# EAGLE board qsd67lc (EAGLE 9.2.1)
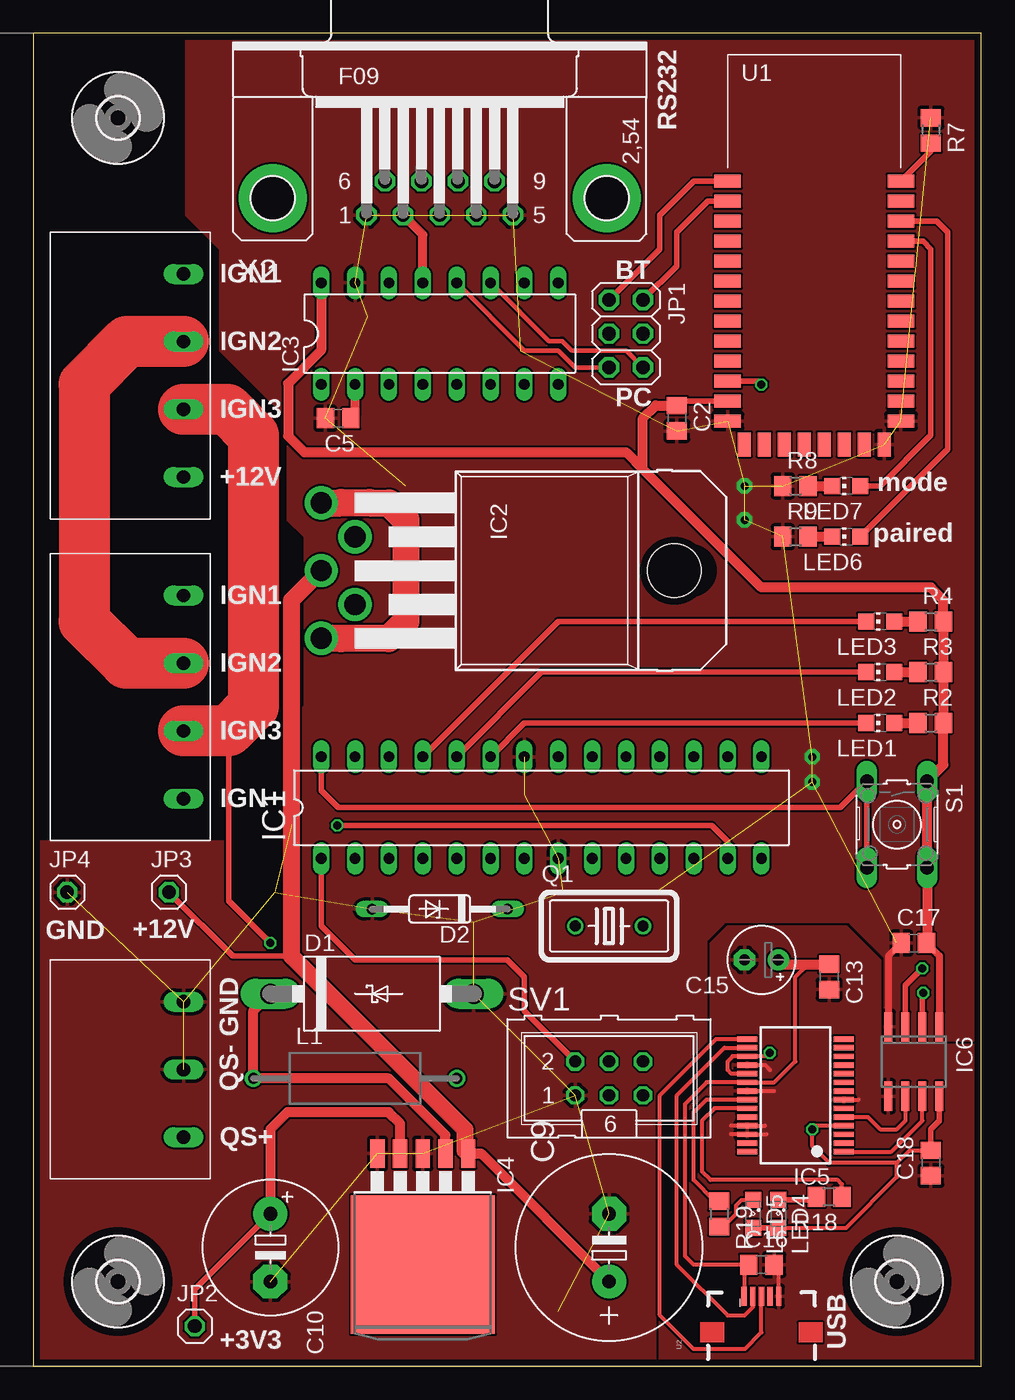
[diagram p0: board, top side]
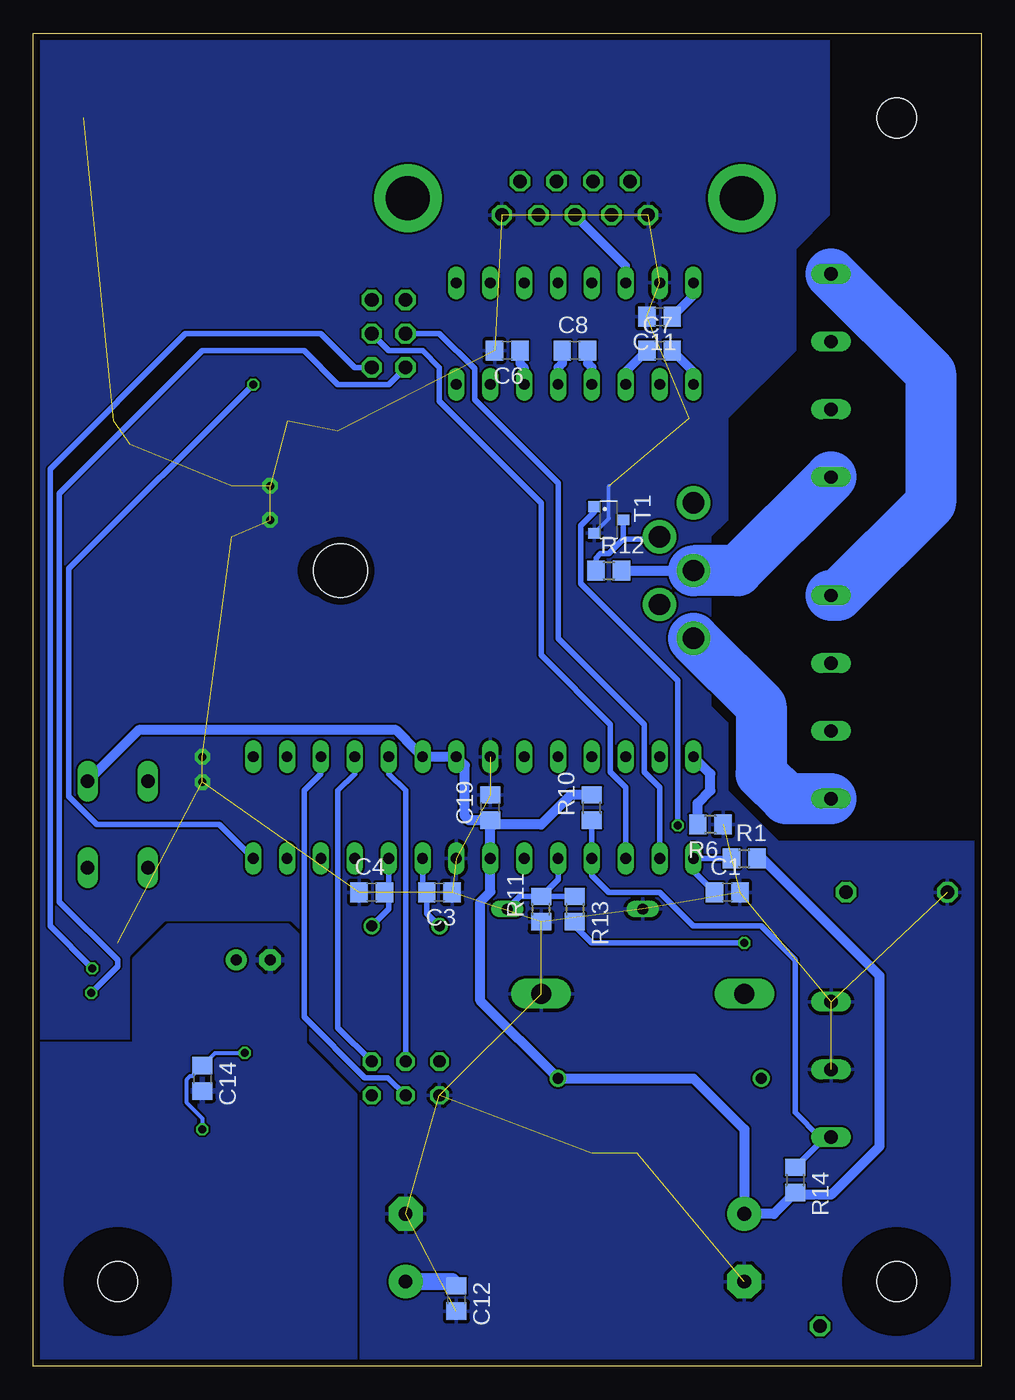
[diagram p1: board, bottom side, seen from below]

Size 71.1 x 100 mm. Coordinates in mm from the lower left corner, seen from the top.
Outline: 0,0 71.1,0 71.1,100 0,100 0,0
Copper layers (1*16): Top 0.035mm / dielectric 1.6mm / Bottom 0.035mm
Design rules "Elecrow_2-layer_PCB_eagle_rule": minimum track width 6mil, minimum drill 12mil, track to track 6mil, track to pad 6mil, pad to pad 6mil, via to via 8mil, smd to smd 0mil, copper to edge 20mil, drill to drill 10mil, minimum pad ring 6mil, minimum via ring 6mil, stop-mask expansion 0mil, vias tented up to drill 100mil, thermal gap 10mil

## Footprints (pad centres in the part's own frame; a part is rotated, then mirrored left to right if it is on the bottom)
C0805 = smd 1.3 x 1.5: 1 -0.95,0; 2 0.95,0
E5-13 = drill 1.016 pad 2.54: + -2.54,0 | drill 1.016 pad 2.54 octagon: - 2.54,0
E5-10,5 = drill 1.016 pad 2.54: + -2.54,0 | drill 1.016 pad 2.54 octagon: - 2.54,0
E2,5-5 = drill 0.813 pad 1.6: + -1.27,0 | drill 0.813 pad 1.6 octagon: - 1.27,0
CON-RIA-P4 = drill 1 long: P$1 3.14,10; P$2 8.22,10; P$3 13.3,10; P$4 18.38,10
CON-RIA-P3 = drill 1 long: P$1 3.14,10; P$2 8.22,10; P$3 13.3,10
DO201T15 = drill 1.499 long: A 7.62,0; C -7.62,0
DO35Z10 = drill 0.813 long: A 5.08,0; C -5.08,0
3,0 = hole 3: 0,0
DIL28-3 = drill 0.813 long: 1 -16.51,-3.81; 2 -13.97,-3.81; 3 -11.43,-3.81; 4 -8.89,-3.81; 5 -6.35,-3.81; 6 -3.81,-3.81; 7 -1.27,-3.81; 8 1.27,-3.81; 9 3.81,-3.81; 10 6.35,-3.81; 11 8.89,-3.81; 12 11.43,-3.81; 13 13.97,-3.81; 14 16.51,-3.81; 15 16.51,3.81; 16 13.97,3.81; 17 11.43,3.81; 18 8.89,3.81; 19 6.35,3.81; 20 3.81,3.81; 21 1.27,3.81; 22 -1.27,3.81; 23 -3.81,3.81; 24 -6.35,3.81; 25 -8.89,3.81; 26 -11.43,3.81; 27 -13.97,3.81; 28 -16.51,3.81
TO220-52 = drill 1.6 pad 2.5: 1 -5.08,-30.48; 2 -2.54,-27.94; 3 0,-30.48; 4 2.54,-27.94; 5 5.08,-30.48 | hole 4.05: 0,-4
DIL16 = drill 0.813 long: 1 -8.89,-3.81; 2 -6.35,-3.81; 3 -3.81,-3.81; 4 -1.27,-3.81; 5 1.27,-3.81; 6 3.81,-3.81; 7 6.35,-3.81; 8 8.89,-3.81; 9 8.89,3.81; 10 6.35,3.81; 11 3.81,3.81; 12 1.27,3.81; 13 -1.27,3.81; 14 -3.81,3.81; 15 -6.35,3.81; 16 -8.89,3.81
TO263-5 = smd 1.067 x 2.159: 1 -3.404,-5.791; 2 -1.702,-5.791; 3 0,-5.791; 4 1.702,-5.791; 5 3.404,-5.791 | smd 10.8 x 10.41: 6 0,2.54
SSOP28 = smd 0.4 x 1.5: 1 -4.225,-3.625; 2 -3.575,-3.625; 3 -2.925,-3.625; 4 -2.275,-3.625; 5 -1.625,-3.625; 6 -0.975,-3.625; 7 -0.325,-3.625; 8 0.325,-3.625; 9 0.975,-3.625; 10 1.625,-3.625; 11 2.275,-3.625; 12 2.925,-3.625; 13 3.575,-3.625; 14 4.225,-3.625; 15 4.225,3.625; 16 3.575,3.625; 17 2.925,3.625; 18 2.275,3.625; 19 1.625,3.625; 20 0.975,3.625; 21 0.325,3.625; 22 -0.325,3.625; 23 -0.975,3.625; 24 -1.625,3.625; 25 -2.275,3.625; 26 -2.925,3.625; 27 -3.575,3.625; 28 -4.225,3.625
SO-08 = smd 0.6 x 2.2: 1 -1.905,-2.6; 2 -0.635,-2.6; 3 0.635,-2.6; 4 1.905,-2.6; 5 1.905,2.6; 6 0.635,2.6; 7 -0.635,2.6; 8 -1.905,2.6
2X03 = drill 1.016 octagon: 1 -2.54,-1.27; 2 -2.54,1.27; 3 0,-1.27; 4 0,1.27; 5 2.54,-1.27; 6 2.54,1.27
1X01 = drill 1.016 octagon: 1 0,0
2200-15.24 = drill 0.8 pad 1.27: 1 -7.62,0; 2 7.62,0
CHIP-LED0805 = smd 1.2 x 1.2: A 0,-1.05; C 0,1.05
SML0805 = smd 1.2 x 1.2: A 1.05,0; C -1.05,0
HC18U-V = drill 0.813: 1 -2.54,0; 2 2.54,0
R0805 = smd 1.3 x 1.5: 1 -0.95,0; 2 0.95,0
B3F-10XX = drill 1.016 long: 1 -3.251,2.261; 2 3.251,2.261; 3 -3.251,-2.261; 4 3.251,-2.261
ML6 = drill 0.914 octagon: 1 -2.54,-1.27; 2 -2.54,1.27; 3 0,-1.27; 4 0,1.27; 5 2.54,-1.27; 6 2.54,1.27
SOT23-R_INFINEON = smd 0.8 x 0.9: 1 -1,-1.1; 2 1,-1.1; 3 0,1.1
BLUETOOTH_SMD = smd 2 x 1: 1 -6.35,3.81; 2 -6.35,2.31; 3 -6.35,0.81; 4 -6.35,-0.69; 5 -6.35,-2.19; 6 -6.35,-3.69; 7 -6.35,-5.19; 8 -6.35,-6.69; 9 -6.35,-8.19; 10 -6.35,-9.69; 11 -6.35,-11.19; 12 -6.35,-12.69; 13 -6.35,-14.19; 22 6.65,-14.19; 23 6.65,-12.69; 24 6.65,-11.19; 25 6.65,-9.69; 26 6.65,-8.19; 27 6.65,-6.69; 28 6.65,-5.19; 29 6.65,-3.69; 30 6.65,-2.19; 31 6.65,-0.69; 32 6.65,0.81; 33 6.65,2.31; 34 6.65,3.81 | smd 1 x 1.8: 14 -5.1,-15.94; 15 -3.6,-15.94; 16 -2.1,-15.94; 17 -0.6,-15.94; 18 0.9,-15.94; 19 2.4,-15.94; 20 3.9,-15.94; 21 5.4,-15.94
USB-MICRO-SMD = smd 1.4 x 0.4: D+1 2.7,0; D-1 2.7,0.65; GND1 2.7,-1.3; ID1 2.7,-0.65; VBUS1 2.7,1.3
F09HP = drill 1.016 octagon: 1 -5.486,-1.27; 2 -2.743,-1.27; 3 0,-1.27; 4 2.743,-1.27; 5 5.486,-1.27; 6 -4.115,1.27; 7 -1.372,1.27; 8 1.372,1.27; 9 4.115,1.27 | drill 3.302 pad 5.08: G1 -12.522,0; G2 12.522,0

## Placement (x,y rotation side)
C1  100nF  [C0805]  19.05,35.56 0 bottom
C2  100nF  [C0805]  48.26,71.12 270 top
C3  15pF  [C0805]  40.64,35.56 180 bottom
C4  15pF  [C0805]  45.72,35.56 0 bottom
C5  100nF  [C0805]  22.86,71.12 180 top
C6  100nF  [C0805]  35.56,76.2 180 bottom
C7  100nF  [C0805]  24.13,76.2 0 bottom
C8  100nF  [C0805]  30.48,76.2 0 bottom
C9  100uF  [E5-13]  43.18,8.89 90 top
C10  1000uF  [E5-10,5]  17.78,8.89 270 top
C11  100nF  [C0805]  24.13,78.74 180 bottom
C12  100nF  [C0805]  39.37,5.08 270 bottom
C13  100nF  [C0805]  59.69,29.21 270 top
C14  100nF  [C0805]  58.42,21.59 270 bottom
C15  4,7µF  [E2,5-5]  54.61,30.48 180 top
C16  100nF  [C0805]  54.61,7.62 0 top
C17  100nF  [C0805]  66.04,31.75 0 top
C18  100nF  [C0805]  67.31,15.24 90 top
C19  100nF  [C0805]  36.83,41.91 90 bottom
CON1  RIA-AKL-230-04  [CON-RIA-P4]  1.27,85.09 270 top
CON2  RIA-AKL-230-04  [CON-RIA-P4]  1.27,60.96 270 top
CON3  RIA-AKL-230-03  [CON-RIA-P3]  1.27,30.48 270 top
D1  1N5822  [DO201T15]  25.4,27.94 0 top
D2  BZX55C3V3  [DO35Z10]  30.48,34.29 180 top
H1  MOUNT-HOLE3.0  [3,0]  6.35,6.35 0 top
H3  MOUNT-HOLE3.0  [3,0]  64.77,6.35 0 top
H4  MOUNT-HOLE3.0  [3,0]  6.35,93.65 0 top
IC1  MEGA8-P  [DIL28-3]  38.1,41.91 0 top
IC2  BTS555E3146  [TO220-52]  52.07,59.69 270 top
IC3  MAX3232CPE  [DIL16]  30.48,77.47 0 top
IC4  LM2576S  [TO263-5]  29.21,10.16 180 top
IC5  FT232RL  [SSOP28]  57.15,20.32 90 top
IC6  ISO7221A  [SO-08]  66.04,22.86 180 top
JP1  UART_SELECTOR  [2X03]  44.45,77.47 270 top
JP2  [1X01]  12.11,3 0 top
JP3  [1X01]  10.16,35.56 0 top
JP4  [1X01]  2.54,35.56 0 top
L1  100uH  [2200-15.24]  24.13,21.59 0 top
LED1  blue  [CHIP-LED0805]  63.5,48.26 90 top
LED2  green  [CHIP-LED0805]  63.5,52.07 90 top
LED3  red  [CHIP-LED0805]  63.5,55.88 90 top
LED4  green  [SML0805]  55.88,11.43 270 top
LED5  orange  [SML0805]  53.98,11.43 270 top
LED6  red  [CHIP-LED0805]  60.96,62.23 90 top
LED7  blue  [CHIP-LED0805]  60.96,66.04 90 top
Q1  16MHz  [HC18U-V]  43.18,33.02 0 top
R1  10k  [R0805]  17.78,38.1 0 bottom
R2  220R  [R0805]  67.31,48.26 0 top
R3  220R  [R0805]  67.31,52.07 0 top
R4  220R  [R0805]  67.31,55.88 0 top
R6  10k  [R0805]  20.32,40.64 180 bottom
R7  10k  [R0805]  67.31,92.71 270 top
R8  220R  [R0805]  57.15,66.04 0 top
R9  220R  [R0805]  57.15,62.23 0 top
R10  10k  [R0805]  29.21,41.91 90 bottom
R11  33k  [R0805]  33.02,34.29 90 bottom
R12  2k2  [R0805]  27.94,59.69 0 bottom
R13  67k  [R0805]  30.48,34.29 270 bottom
R14  10k  [R0805]  13.97,13.97 270 bottom
R18  270R  [R0805]  59.69,12.7 180 top
R19  270R  [R0805]  51.44,11.43 270 top
S1  [B3F-10XX]  64.77,40.64 270 top
SV1  ISP  [ML6]  43.18,21.59 0 top
T1  BCR141  [SOT23-R_INFINEON]  27.94,63.5 270 bottom
U1  HC_05  [BLUETOOTH_SMD]  58.42,85.09 0 top
U2  [USB-MICRO-SMD]  54.61,2.54 90 top
X2  RS232  [F09HP]  30.48,87.63 0 top

## Library data of the parts
C1-C19 = rcl; SPICEPREFIX: C
CON1-CON3 = con-ria
D1 D2 = diode
H1 H3 H4 = holes
IC1 = atmel; OC_FARNELL: unknown; OC_NEWARK: unknown
IC2 = infineon; OC_FARNELL: unknown; OC_NEWARK: unknown
IC3 = maxim; MF: MAXIM; MPN: MAX3232CPE+; OC_FARNELL: 9724494; OC_NEWARK: 68K4626
IC4 = v-reg-3
IC5 = ftdichip; MPN: FT232RL; OC_FARNELL: 1146032; OC_NEWARK: 91K9918
IC6 = texas; MPN: ISO7221AD; OC_FARNELL: 1390651; OC_NEWARK: 48M0672
JP1-JP4 = pinhead
L1 = rcl; SPICEPREFIX: L
LED1-LED7 = led
Q1 = crystal; OC_FARNELL: unknown; OC_NEWARK: unknown
R1-R4 R6-R14 R18 R19 = rcl; SPICEPREFIX: R
S1 = switch-omron; MPN: B3F-1000; OC_FARNELL: 176432; OC_NEWARK: 36M3542
SV1 = con-harting-ml; OC_FARNELL: unknown; OC_NEWARK: unknown
T1 = digital-transistors-2
U1 = Bluetooth HC-05
U2 = MicroUSB
X2 = con-subd; OC_FARNELL: unknown; OC_NEWARK: unknown

## Nets
12V_OUT: CON2.P$4 IC2.1 IC2.5
+3V3: C2.1 C10.+ C11.1 C17.2 C19.1 IC1.7 IC1.20 IC1.21 IC3.16 IC4.4 IC6.1 JP2.1 L1.2 R1.2 R2.2 R3.2 R4.2 R10.2 R14.2 S1.1 S1.2 U1.12
+12V: C9.+ C12.1 CON1.P$4 IC2.3 IC4.1 JP3.1 R12.2
CS: IC1.16
GND: C1.2 C2.2 C3.1 C4.1 C5.2 C6.2 C9.- C10.- C11.2 C12.2 C17.1 C19.2 CON3.P$1 CON3.P$2 D1.A D2.A IC1.8 IC1.22 IC3.15 IC4.3 IC4.5 IC6.4 JP4.1 R6.1 R7.1 R8.1 R9.1 R11.1 SV1.1 T1.2 U1.13 U1.21 U1.22 X2.1 X2.5
GND_USB: C13.2 C14.2 C15.- C16.2 C18.1 IC5.7 IC5.18 IC5.21 IC5.25 IC5.26 IC6.5 U2.GND1
HC05_RST: IC1.14 U1.11
IGN0: CON1.P$3 CON2.P$3 R13.2
IGN1: CON1.P$2 CON2.P$2
IGN2: CON1.P$1 CON2.P$1
IGN_CTL: IC1.13 T1.1
MISO: IC1.18 SV1.6
MODE_KEY: R7.2 U1.34
MOSI: IC1.17 SV1.3
N$1: IC1.24 LED2.C
N$2: C3.2 IC1.9 Q1.1
N$3: C4.2 IC1.10 Q1.2
N$4: LED2.A R3.1
N$5: LED1.A R2.1
N$6: LED3.A R4.1
N$7: IC1.23 LED1.C
N$9: IC1.25 LED3.C
N$11: C5.1 IC3.2
N$12: IC1.28 R6.2 S1.3 S1.4
N$13: LED7.C R8.2
N$14: LED6.C R9.2
N$15: C6.1 IC3.6
N$16: IC2.2 R12.1 T1.3
N$17: C7.2 IC3.1
N$18: C8.2 IC3.4
N$19: C8.1 IC3.5
N$20: C7.1 IC3.3
N$22: D1.C IC4.2 L1.1
N$23: LED4.C R18.2
N$26: LED5.C R19.2
PAIRED_STATE: LED6.A U1.32
QS+: CON3.P$3 IC1.4 R10.1 R14.1
RESET: C1.1 IC1.1 R1.1 SV1.2
RPM_INT: D2.C IC1.5 R11.2 R13.1
RS232_RX: IC3.14 X2.3
RS232_RX_D: IC5.1 IC6.7
RS232_TX: IC3.13 X2.2
RS232_TX_D: IC5.5 IC6.6
RXD: IC1.2 JP1.3
RXD_BT: JP1.1 U1.1
RXD_RS232: IC3.12 IC6.2 JP1.5
SCK: IC1.19 SV1.4
TXD: IC1.3 JP1.4
TXD_BT: JP1.2 U1.2
TXD_RS232: IC3.11 IC6.3 JP1.6
USB_D+: IC5.15 U2.D+1
USB_D-: IC5.16 U2.D-1
USB_RX_LED: IC5.23 R18.1
USB_TX_LED: IC5.22 R19.1
VCC_USB: C13.1 C15.+ C16.1 IC5.20 U2.VBUS1
VCCIO_USB: C14.1 C18.2 IC5.4 IC5.17 IC5.19 IC6.8 LED4.A LED5.A
WORK_MODE: LED7.A U1.31

## Tracks (layer width: path | path; a pad name or v marks a point on that pad's centre or on a via)
12V_OUT
  Top 2.032: IC2.1 23.03,64.77 23.07,64.8 25.2,64.8 25.23,64.77 26.67,64.77 27.94,63.5 27.94,59.69 27.94,55.88 26.64,54.58 23.07,54.58 23.03,54.61 IC2.5
  Bottom 3.81: IC2.5 16.51,49.53 16.51,44.45 14.64,42.58 CON2.P$4
+3V3
  Top 0.406: C2.1 48.59,72.4 U1.12 | JP2.1 12.11,5.76 C10.+
  Top 0.508: C17.2 67.94,30.8 IC6.1
  Top 0.762: IC4.4 27.51,18.21 26.67,19.05 19.05,19.05 17.78,17.78 C10.+ | 45.72,67.31 54.61,58.42 67.31,58.42 68.26,57.47 R4.2 R3.2 R2.2 68.26,45.12 S1.1 S1.2 67.03,31.79 C17.2 | C2.1 46.67,72.07 45.72,71.12 45.72,67.31 | IC3.16 21.59,76.22 19.1,73.73 19.1,69.8 20.32,68.58 44.45,68.58 45.72,67.31
  Bottom 0.406: R14.2 14.13,12.86
  Bottom 0.66: C11.1 21.59,80.33 IC3.16 | 36.51,40.64 C19.1
  Bottom 0.762: R10.2 30.8,42.86 33.02,40.64 36.51,40.64 | S1.1 63.2,47.73 43.89,47.73 43.1,46.94 43.1,46.91 IC1.20 IC1.21 38.73,45.09 38.73,41.27 38.42,40.96 C19.1 IC1.7 36.83,35.58 37.57,34.85 37.57,27.41 L1.2 21.59,21.59 17.78,17.78 C10.+ 15.56,11.43 14.13,12.86 11.27,12.86 7.62,16.51 7.62,29.29 16.43,38.1 R1.2
+12V
  Top 0.406: 19.36,30.77 14.95,30.77 JP3.1
  Top 0.762: IC4.1 33.58,15.95 C9.+
  Top 1.27: IC4.1 32.38,16.18 32.38,17.74 19.36,30.77 19.36,57.45 IC2.3
  Bottom 0.762: R12.2 IC2.3
  Bottom 1.27: C12.1 39.69,6.35 C9.+
  Bottom 3.81: CON1.P$4 18.29,59.69 IC2.3
GND  (via drill 0.6 pad 1.15)  (37 unrouted)
  Top 0.305: 64.14,26.04 IC6.4 | 64.77,31.75 C17.1
  Top 0.508: C17.1 64.14,30.8 IC6.4
  Bottom 0.305: T1.2 27.94,63.6 27.94,66.04
  other vias: 58.42,45.72 58.42,43.81 53.34,63.5 53.34,66.04
  pour Bottom (rank 3): 11.43,100.33 11.43,86.36 13.97,83.82 13.97,76.2 19.05,71.12 19.05,63.5 20.32,62.23 20.32,49.53 19.05,48.26 19.05,43.18 15.24,39.37 0,39.37 0,0 71.12,0 71.12,100.33
  pour Top (rank 3): 11.43,100.33 11.43,86.36 13.97,83.82 13.97,76.2 19.05,71.12 19.05,63.5 20.32,62.23 20.32,49.53 19.05,48.26 19.05,43.18 15.24,39.37 0,39.37 0,0 71.12,0 71.12,100.33
GND_USB
  Top 0.305: U2.GND1 55.91,7.27 C16.2 | 54.88,18.05 IC5.25 52.34,18.05 | 54.99,17.39 IC5.26 52.32,17.39 | IC5.21 55.55,20.64 | IC5.7 61.91,20 | IC5.18 54.88,22.59 55.24,22.23
  pour Top: 71.12,0 46.99,0 46.99,20.32 50.8,24.13 50.8,31.75 52.07,33.02 60.96,33.02 63.5,30.48 63.5,24.13 71.12,24.13
  pour Bottom: 71.12,24.13 71.12,0 46.99,0 46.99,20.32 50.8,24.13 50.8,31.75 52.07,33.02 60.96,33.02 63.5,30.48 63.5,24.13
HC05_RST  (via drill 0.6)
  Top 0.406: U1.11 54.37,73.9 v54.61,73.66
  Bottom 0.406: IC1.14 57.15,40.64 66.34,40.64 68.43,42.73 68.43,59.84 v54.61,73.66
IGN0  (via drill 0.6)
  Top 0.406: v17.78,31.75 14.64,34.89 14.64,47.66
  Top 3.81: CON1.P$3 14.57,71.79 16.51,69.85 16.51,49.53 14.64,47.66 CON2.P$3
  Bottom 0.406: R13.2 30.48,33.02 29.21,31.75 v17.78,31.75
IGN1
  Top 3.81: CON1.P$2 7.02,76.87 3.81,73.66 3.81,55.88 6.95,52.74 CON2.P$2
IGN2
  Bottom 3.81: CON1.P$1 3.81,74.49 3.81,64.77 10.76,57.82 CON2.P$1
IGN_CTL  (via drill 0.6)
  Top 0.406: IC1.13 52.07,39.37 50.88,40.56 v22.78,40.56
  Bottom 0.406: v22.78,40.56 22.78,51.46 30.05,58.73 30.05,63.06 29.04,64.07 T1.1
MISO
  Bottom 0.406: SV1.6 48.26,25.4 48.26,43.18 46.99,44.45 IC1.18
MODE_KEY
  Top 0.406: U1.34 67.31,91.14 R7.2
MOSI
  Bottom 0.406: SV1.3 44.5,21.64 46.23,21.64 50.8,26.22 50.8,43.18 49.53,44.45 IC1.17
N$1
  Top 0.406: LED2.C 38.1,52.07 IC1.24
N$2
  Bottom 0.406: Q1.1 41.59,33.97 C3.2 41.91,35.88 IC1.9
N$3
  Bottom 0.406: Q1.2 44.45,34.29 44.45,35.24 C4.2 44.45,35.88 IC1.10
N$4
  Top 0.762: LED2.A R3.1
N$5
  Top 0.762: LED1.A R2.1
N$6
  Top 0.762: LED3.A R4.1
N$7
  Top 0.406: LED1.C 36.83,48.26 IC1.23
N$9
  Top 0.406: LED3.C 39.37,55.88 IC1.25
N$11
  Top 0.66: C5.1 24.13,71.44 IC3.2
N$12
  Top 0.406: S1.4 S1.3 60.53,41.91 22.86,41.91 21.59,43.18 IC1.28
  Bottom 0.762: R6.2 21.27,42.23 20.32,43.18 20.32,44.45 IC1.28
N$13
  Top 0.762: R8.2 LED7.C
N$14
  Top 0.762: R9.2 LED6.C
N$15
  Bottom 0.66: C6.1 34.61,75.25 34.29,74.93 IC3.6
N$16
  Bottom 0.406: T1.3 26.84,62.06 | 26.84,62.06 27.94,60.96 28.57,60.96 28.89,60.65 R12.1 | 26.84,62.06 24.3,62.06 IC2.2
N$17
  Bottom 0.66: C7.2 21.59,74.61 IC3.1
N$18
  Bottom 0.66: C8.2 29.53,75.25 29.21,74.93 IC3.4
N$19
  Bottom 0.66: C8.1 31.43,75.25 31.75,74.93 IC3.5
N$20
  Bottom 0.66: C7.1 26.67,74.61 IC3.3
N$22
  Top 0.762: IC4.2 30.91,17.35 26.67,21.59 L1.1 16.51,26.67 D1.C
N$23
  Top 0.406: LED4.C 58.52,12.48 R18.2
N$26
  Top 0.305: LED5.C 53.12,12.48 52.7,12.06 52.7,11.43 52.07,10.79 51.75,10.79 R19.2
PAIRED_STATE
  Top 0.406: LED6.A 68.58,68.8 68.58,85.09 67.77,85.9 U1.32
QS+
  Bottom 0.406: R10.1 IC1.4 29.21,36.83 27.94,35.56 24.13,35.56 21.59,33.02 16.51,33.02 13.97,30.48 13.97,19.05 12.1,17.18 CON3.P$3 11.71,17.18 R14.1
RESET
  Top 0.406: SV1.2 36.83,26.67 36.83,29.21 35.56,30.48 24.13,30.48 21.59,33.02 IC1.1
  Bottom 0.406: C1.1 21.59,37.15 IC1.1 R1.1
RPM_INT
  Bottom 0.406: D2.C 34.61,35.24 R11.2 | R11.2 R13.1 | R11.2 31.75,36.51 IC1.5
RS232_RX
  Bottom 0.66: IC3.14 26.67,82.55 X2.3
RS232_RX_D
  Top 0.305: IC6.7 66.67,18.41 64.36,16.09 IC5.1
RS232_TX
  Top 0.66: IC3.13 29.21,84.89 X2.2
RS232_TX_D
  Top 0.305: IC6.6 65.41,18.41 64.77,17.78 63.5,17.78 62.59,18.7 IC5.5
RXD
  Bottom 0.406: JP1.3 40.64,77.47 38,74.83 38,72.52 31.75,66.27 31.75,54.61 25.3,48.16 25.3,44.58 24.13,43.41 IC1.2
RXD_BT
  Top 0.406: JP1.1 46.99,83.82 46.99,86.36 49.53,88.9 U1.1
RXD_RS232  (via drill 0.6)
  Top 0.356: IC3.12 36.83,76.2 39.37,76.2 40.64,74.93 JP1.5
  Top 0.406: IC6.2 66.67,27.94 v66.75,28.02
  Bottom 0.406: JP1.5 44.45,73.66 48.26,73.66 50.8,76.2 58.42,76.2 69.14,65.48 69.14,34.85 64.77,30.48 64.77,30 v66.75,28.02
SCK
  Bottom 0.406: SV1.4 43.18,43.18 44.45,44.45 IC1.19
TXD
  Bottom 0.406: JP1.4 44.45,76.2 41.91,76.2 40.64,74.93 40.64,72.39 33.02,64.77 33.02,53.34 27.84,48.16 27.84,44.58 26.67,43.41 IC1.3
TXD_BT
  Top 0.406: JP1.2 48.26,82.55 48.26,85.09 50.57,87.4 U1.2
TXD_RS232  (via drill 0.6)
  Top 0.356: IC3.11 38.66,76.91 39.66,76.91 40.38,76.2 44.45,76.2 JP1.6
  Top 0.406: IC6.3 65.41,28.57 v66.67,29.84
  Bottom 0.406: JP1.6 46.99,74.93 49.53,77.47 59.69,77.47 69.85,67.31 69.85,33.02 v66.67,29.84
USB_D+
  Top 0.305: IC5.15 51.22,24.55 46.99,20.32 46.99,3.81 49.53,1.27 53.34,1.27 54.61,2.54 U2.D+1
USB_D-
  Top 0.305: IC5.16 51.84,23.89 48.26,20.32 48.26,7.62 52.07,3.81 53.34,3.81 53.96,4.43 U2.D-1
USB_RX_LED
  Top 0.305: R18.1 60.64,13.65 60.33,13.97 50.8,13.97 50.14,14.63 50.14,18.39 51.09,19.34 IC5.23
USB_TX_LED
  Top 0.305: IC5.22 50.48,20 49.53,19.05 49.53,13.97 51.12,12.38 R19.1
VCC_USB
  Top 0.305: C13.1 58.1,30.16 57.15,29.21 57.15,22.86 55.59,21.3 IC5.20 50.51,21.3 48.87,19.66 48.87,8.28 49.53,7.62 C16.1 53.31,7.27 U2.VBUS1
  Top 0.762: C15.+ 56.2,30.16 C13.1
VCCIO_USB  (via drill 0.6)
  Top 0.305: LED4.A 60.96,10.38 64.77,14.19 64.77,15.24 | IC5.19 52.35,21.95 52.07,22.23 52.07,22.86 52.45,23.25 IC5.17 54.99,23.25 v55.24,23.5 | C18.2 65.72,16.19 64.77,15.24 | 64.77,15.24 59.69,15.24 58.42,16.51 v58.42,17.78 58.69,18.05 IC5.4
  Top 0.406: LED5.A LED4.A | C18.2 67.31,17.78 67.94,18.41 IC6.8
  Bottom 0.305: v58.42,17.78 58.42,18.59 59.63,19.8 59.63,21.48 59.36,21.75 59.21,21.75 C14.1 57.47,23.5 v55.24,23.5
WORK_MODE
  Top 0.406: U1.31 66.73,84.4 67.31,83.82 67.31,69.85 63.5,66.04 LED7.A

## Text on the board
tPlace: RS232 | BT | IGN1 | IGN2 | PC | IGN3 | +12V | mode | paired | IGN1 | IGN2 | IGN3 | IGN+ | GND | +12V | GND | QS- | QS+ | +3V3 | USB